# Altium PCB LedLampDriver_prob.PcbDoc
Units mm, origin at the board's own origin, x right, y up, seen from the top; angles counter-clockwise.
Board outline 152.4 x 101.6 mm, 2 copper layers (Top Layer, Bottom Layer); 21 components, 9 nets, 47 pads, 2 vias.
Unrouted connection lines stored in the file: 22.
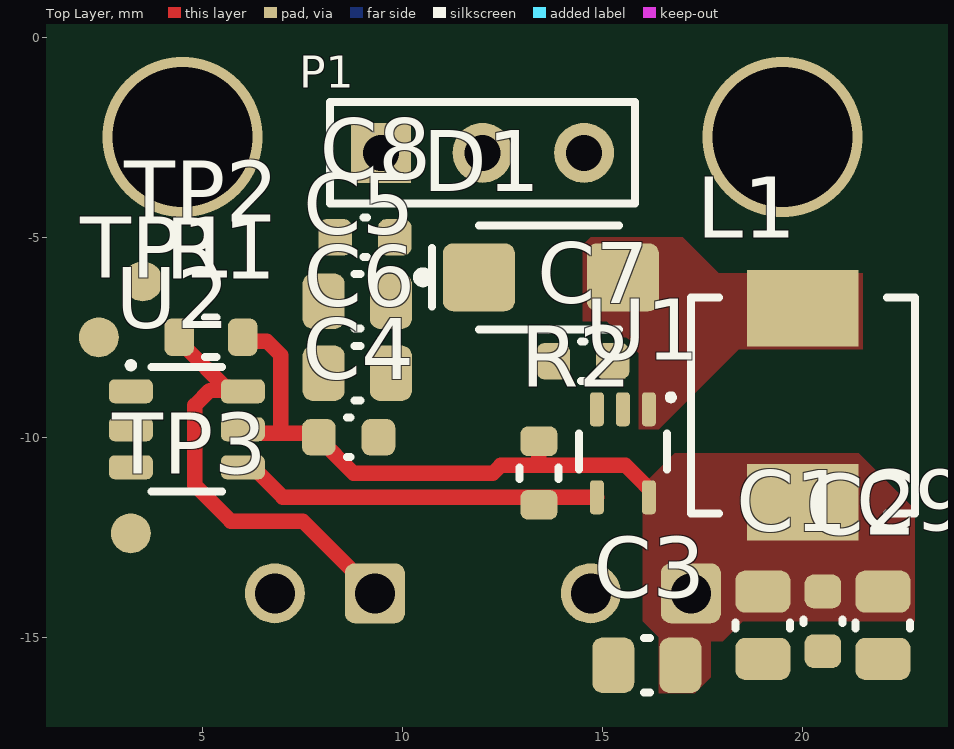
[diagram p0: Top Layer view]
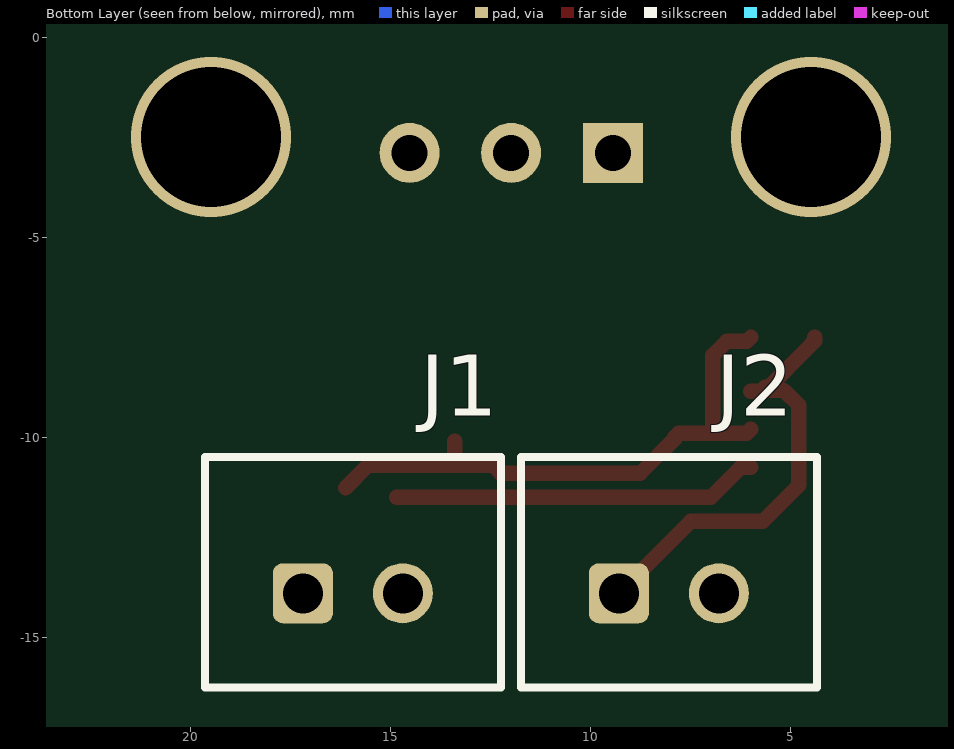
[diagram p1: Bottom Layer view, seen from below]

## Layer stack, top to bottom
Top Solder: solder mask 0.0102, Solder Resist, Dk 3.5
Top Layer: signal copper 0.0356
Dielectric 1: dielectric 0.32, FR-4, Dk 4.8
Bottom Layer: signal copper 0.0356
Bottom Solder: solder mask 0.0102, Solder Resist, Dk 3.5

## Board outline
-55,-67.3 97.4,-67.3 97.4,34.3 -55,34.3

## Design rules (kind name [scope] priority, off if disabled: settings)
Clearance [All] p1: gap=0.15 ignorepadtopadclearanceinfootprint=FALSE except(0: Arc-Hole Track-Hole SMDPad-Hole THPad-Hole Via-Hole Fill-Hole Poly-Hole Region-Hole Text-Hole)
HoleSize [All] p1: absolutevalues=TRUE maxlimit=6.3 minlimit=0.2 maxpercent=80.000 minpercent=20.000
MinimumSolderMaskSliver [All] p1: minsoldermaskwidth=0.15
PlaneConnect [All] p1: planeconnectstyle=Direct reliefexpansion=0.508 reliefentries=4 reliefconductorwidth=0.254 reliefairgap=0.254
PolygonConnect [All] p1: connectstyle=Direct reliefconductorwidth=0.254 reliefentries=4 polygonreliefangle="90 Angle" airgapwidth=0.254
RoutingVias [All] p1: holewidth=0.6 width=0.35 viastyle="Through Hole" minholewidth=0.35 minwidth=0.3 maxholewidth=1.7 maxwidth=1.5
SilkToSilkClearance [All] p1: silktosilkclearance=0.15
SilkToSolderMaskClearance [IsPad] p1: minsilkscreentomaskgap=0.08 clearancetoexposedcopper=TRUE
SolderMaskExpansion [All] p1: expansion=0.045 istentingtop=FALSE
Width [All] p1: maxlimit=1.524 minlimit=0.203 preferedwidth=0.254 minimp=50.000000 maximp=50.000000 favimp=50.000000
25 further rules are at their usual default settings.

## Components (designator, comment, footprint, x,y, rotation, side; value= is the part's Value field where it differs from the comment)
C1 "10u" C0805_N 19,-14.7 r270 top
C2 "10u" C0603_N 20.5,-14.6 r270 top
C3 "100n" C0805_N 16.1,-15.7 r180 top
C4 "100n" C0603_N 8.645,-10 r0 top
C5 "10u" C0805_N 8.86,-6.6 r180 top
C6 "10u" C0805_N 8.86,-8.4 r180 top
C7 "1u" C0603_N 14.5,-8.1 r0 top
C8 "100n" C0603_N 9.055,-5 r180 top
C9 "100n" C0805_N 22,-14.7 r270 top
D1 "DIODE" DO-214AC 13.7,-6 r0 top
J1 "" B2B-XH-A 17.2,-13.9 r180 bottom
J2 "" B2B-XH-A 9.3,-13.9 r180 bottom
L1 "4.7u" IHLP2020 20,-9.2 r90 top
P1 "Header 3" HDR1X3 9.451,-2.89 r0 top locked
R1 "10k" R0603_N 5.2,-7.5 r180 top
R2 "DNP" R0603_N 13.4,-10.895 r270 top
TP1 "TP" TP_1MM 2.4,-7.5 r90 top
TP2 "TP" TP_1MM 3.5,-6.1 r90 top
TP3 "TP" TP_1MM 3.2,-12.4 r90 top
U1 "TPS61169" SC70 15.5,-10.4 r180 top
U2 "PIC10F200" SOT23-6 4.6,-9.8 r270 top

## Footprints (in the part's own frame and the unit in brackets; to place one, negate y for a bottom-side part, rotate by r counter-clockwise, add the part's x,y. Pads: shape width x height; smd on the part's side, far side on the other; paste and mask are expansions set on the pad)
B2B-XH-A [mm] "Header, Vertical, 2.50 mm pitch; 0.70 mm lead width, 5 pins, 1 row, 5 pins per row, 14.90 mm L X 5.75 mm W X 7.00 mm H body"
  rrect33% 1.5x1.5 / inner round 1.5 / far side rrect33% 1.5x1.5 hole 1 paste-1.5: 1(0,0)
  round 1.5 hole 1 paste-1.5: 2(2.5,0)
  silkscreen extent -2.45,-2.35 4.95,3.4, body extent -2.45,-2.35 4.95,3.4, height 7.05
C0603_N [mm] "Capacitor, Chip; 1.60 mm L X 0.80 mm W X 0.87 mm H body"
  rrect50% 0.84x0.91 smd: 1(-0.745,0) 2(0.745,0)
  silkscreen extent -0.05,-0.49 0.05,0.49, body extent -0.8,-0.4 0.8,0.4, height 0.87
C0805_N [mm] "Capacitor, Chip; 2.00 mm L X 1.25 mm W X 1.35 mm H body"
  rrect48% 1.05x1.38 smd: 1(-0.84,0) 2(0.84,0)
  silkscreen extent -0.08,-0.68 0.08,0.68, body extent -1,-0.63 1,0.63, height 1.35
DO-214AC [mm] "SMA"
  rrect30% 1.8x1.7 smd: A(1.8,0) C(-1.8,0)
  silkscreen extent -3.32,-1.3 1.7,1.3, body extent -2.55,-1.33 2.55,1.34, height 2.17
HDR1X3 [mm] "Connector; Header; 3 Position"
  rect 1.5x1.5 hole 0.9: 1(0,0)
  round 1.5 hole 0.9: 2(2.54,0) 3(5.08,0)
  silkscreen extent -1.27,-1.27 6.35,1.27
IHLP2020 [mm] "Inductor, 5.18mm L X 5.18mm W X 3 mm H body"
  rect 1.905x2.79 smd: 1(-2.425,0) 2(2.425,0)
  silkscreen extent -2.7,-2.8 2.7,2.8, body extent -2.73,-2.57 2.73,2.57, height 2.84
R0603_N [mm] "Resistor, Chip; 1.60 mm L X 0.80 mm W X 0.55 mm H body"
  rrect51% 0.74x0.93 smd: 1(-0.795,0) 2(0.795,0)
  silkscreen extent -0.15,-0.49 0.15,0.49, body extent -0.8,-0.4 0.8,0.4, height 0.55
SC70 [mm] "5 pin"
  rrect49% 0.35x0.85 smd: 1(-0.65,-1.1) 2(0,-1.1) 3(0.65,-1.1) 4(0.65,1.1) 5(-0.65,1.1)
  silkscreen extent -1.28,-1.47 1.1,0.4, body extent -1,-1.05 1,1.05, height 0.95
SOT23-6 [mm] "Small Outline Transistor (SOT23), 0.95 mm pitch; 6 pin"
  rrect49% 0.6x1.1 smd: 1(-0.95,-1.4) 2(0,-1.4) 3(0.95,-1.4) 4(0.95,1.4) 5(0,1.4) 6(-0.95,1.4)
  silkscreen extent -1.68,-1.48 1.56,0.88, body extent -1.5,-1.4 1.5,1.4, height 0.86
TP_1MM [mm]
  round 1 smd paste-100 mask+0: 1(0,0)

## Part data
C1 C2 C3 C4 C5 C6 C7 C8 C9: library part CAP, RevS="$Rev:: 58        $"
J1 J2: library part PINHDR_2X1, "Socket", ComponentLink1Description=Manufacturer, ComponentLink1URL=http://www.we-online.de, ComponentLink2Description=Datasheet, ComponentLink2URL=http://katalog.we-online.de/em/datasheet/691412320002.pdf
L1: library part IND, "Inductor"
P1: "Header, 3-Pin", LatestRevisionDate=17-Jul-2002, LatestRevisionNote="Re-released for DXP Platform.", Publisher="Altium Limited"
R1 R2: library part RES
U1: "38V High Current-Boost WLED Driver"
U2: "6-Pin, 8-Bit Flash MCU"

## Via types
v1: diameter 4, hole 3.5, Top Layer to Bottom Layer, tented both sides, 2 vias

## Nets (pads, with @x,y where several pads share a name; then routed paths per layer and width w, separated by ;. In a path a pad name is that pad's centre, name@x,y a point inside that pad or via, vN(x,y) a via of type N, cw(c..) or ccw(c..) an arc to the next point about the centre after c; other vN are vias at no path point)
CTRL: R2.2 U1.4 U2.4 | length 9.2
  Top Layer w0.381: U2.4 6.25,-10.75 7,-11.5 13.2,-11.5 U1.4
FB: P1.2 U1.3
GND: C1.2 C2.2 C3.2 C4.2 C5.2 C6.2 C7.2 C8.2 C9.2 J1.2 J2.2 P1.3 U1.2 U2.2
NetD1_A: D1.A L1.2 U1.1
NetTP1_1: TP1.1 U2.1
NetTP3_1: TP3.1 U2.3
SW: J2.1 R1.2 TP2.1 U2.6 | length 11
  Top Layer w0.381: R1.2 4.405,-7.595 4.585,-7.775 5.551,-8.741 5.64,-8.741 5.66,-8.76 5.66,-8.85 U2.6 ; U2.6@5.75,-8.83 5.17,-8.83 4.8,-9.2 4.8,-11.2 5.7,-12.1 7.5,-12.1 J2.1
Vin: C1.1 C2.1 C3.1 C4.1 C9.1 J1.1 L1.1 R1.1 R2.1 U1.5 U2.5 | length 14.6
  Top Layer w0.381: R1.1 6.095,-7.6 6.6,-7.6 6.95,-7.95 6.95,-9.9 ; U2.5 6.1,-9.9 6.95,-9.9 ; R2.1 13.4,-10.7 ; U1.5@16.135,-11.265 15.569,-10.7 13.4,-10.7 ; 6.95,-9.9 7.8,-9.9 C4.1 7.9,-10.035 8.765,-10.9 12.25,-10.9 12.45,-10.7 13.4,-10.7
Vout: C5.1 C6.1 C7.1 C8.1 D1.C P1.1
copper on no net:
  other v1: 4.491,-2.49 19.491,-2.49

## Polygon pours and split planes (outlines as drawn)
NetD1_A on Top Layer "NETD1_A_L01_P001" (solid, pour order 1): 21.5,-5.9 21.5,-7.8 18.4,-7.8 16.4,-9.8 15.9,-9.8 15.9,-7.9 15.1,-7.1 14.5,-7.1 14.5,-5.2 14.7,-5 17,-5 17.9,-5.9
Vin on Top Layer "VIN_L01_P000" (solid, pour order 0): 16.4,-16.4 17.3,-16.4 17.7,-16 17.7,-15.1 18,-15.1 18.5,-14.6 22.8,-14.6 22.8,-11.8 21.4,-10.4 16.8,-10.4 15.9,-11.3 16,-11.4 16,-14.6 16.4,-15

## Silkscreen, mask and mechanical layers (free items; w line width, h text height)
Mechanical 1:
  lines w0.2: 0,-17 0,0.01 24,0.01 24,-17 0,-17